# Altium PCB COMM_V3.PcbDoc (part 5 of 5)
Units mm, origin at the board's own origin, x right, y up, seen from the top; angles counter-clockwise.
Board outline 93 x 90 mm, 6 copper layers (Top Layer, L2_GND, L3_PWR, L4_SIG, L5_GND, Bottom Layer), stack 1.634 mm thick; 271 components, 237 nets, 1362 pads, 1090 vias.
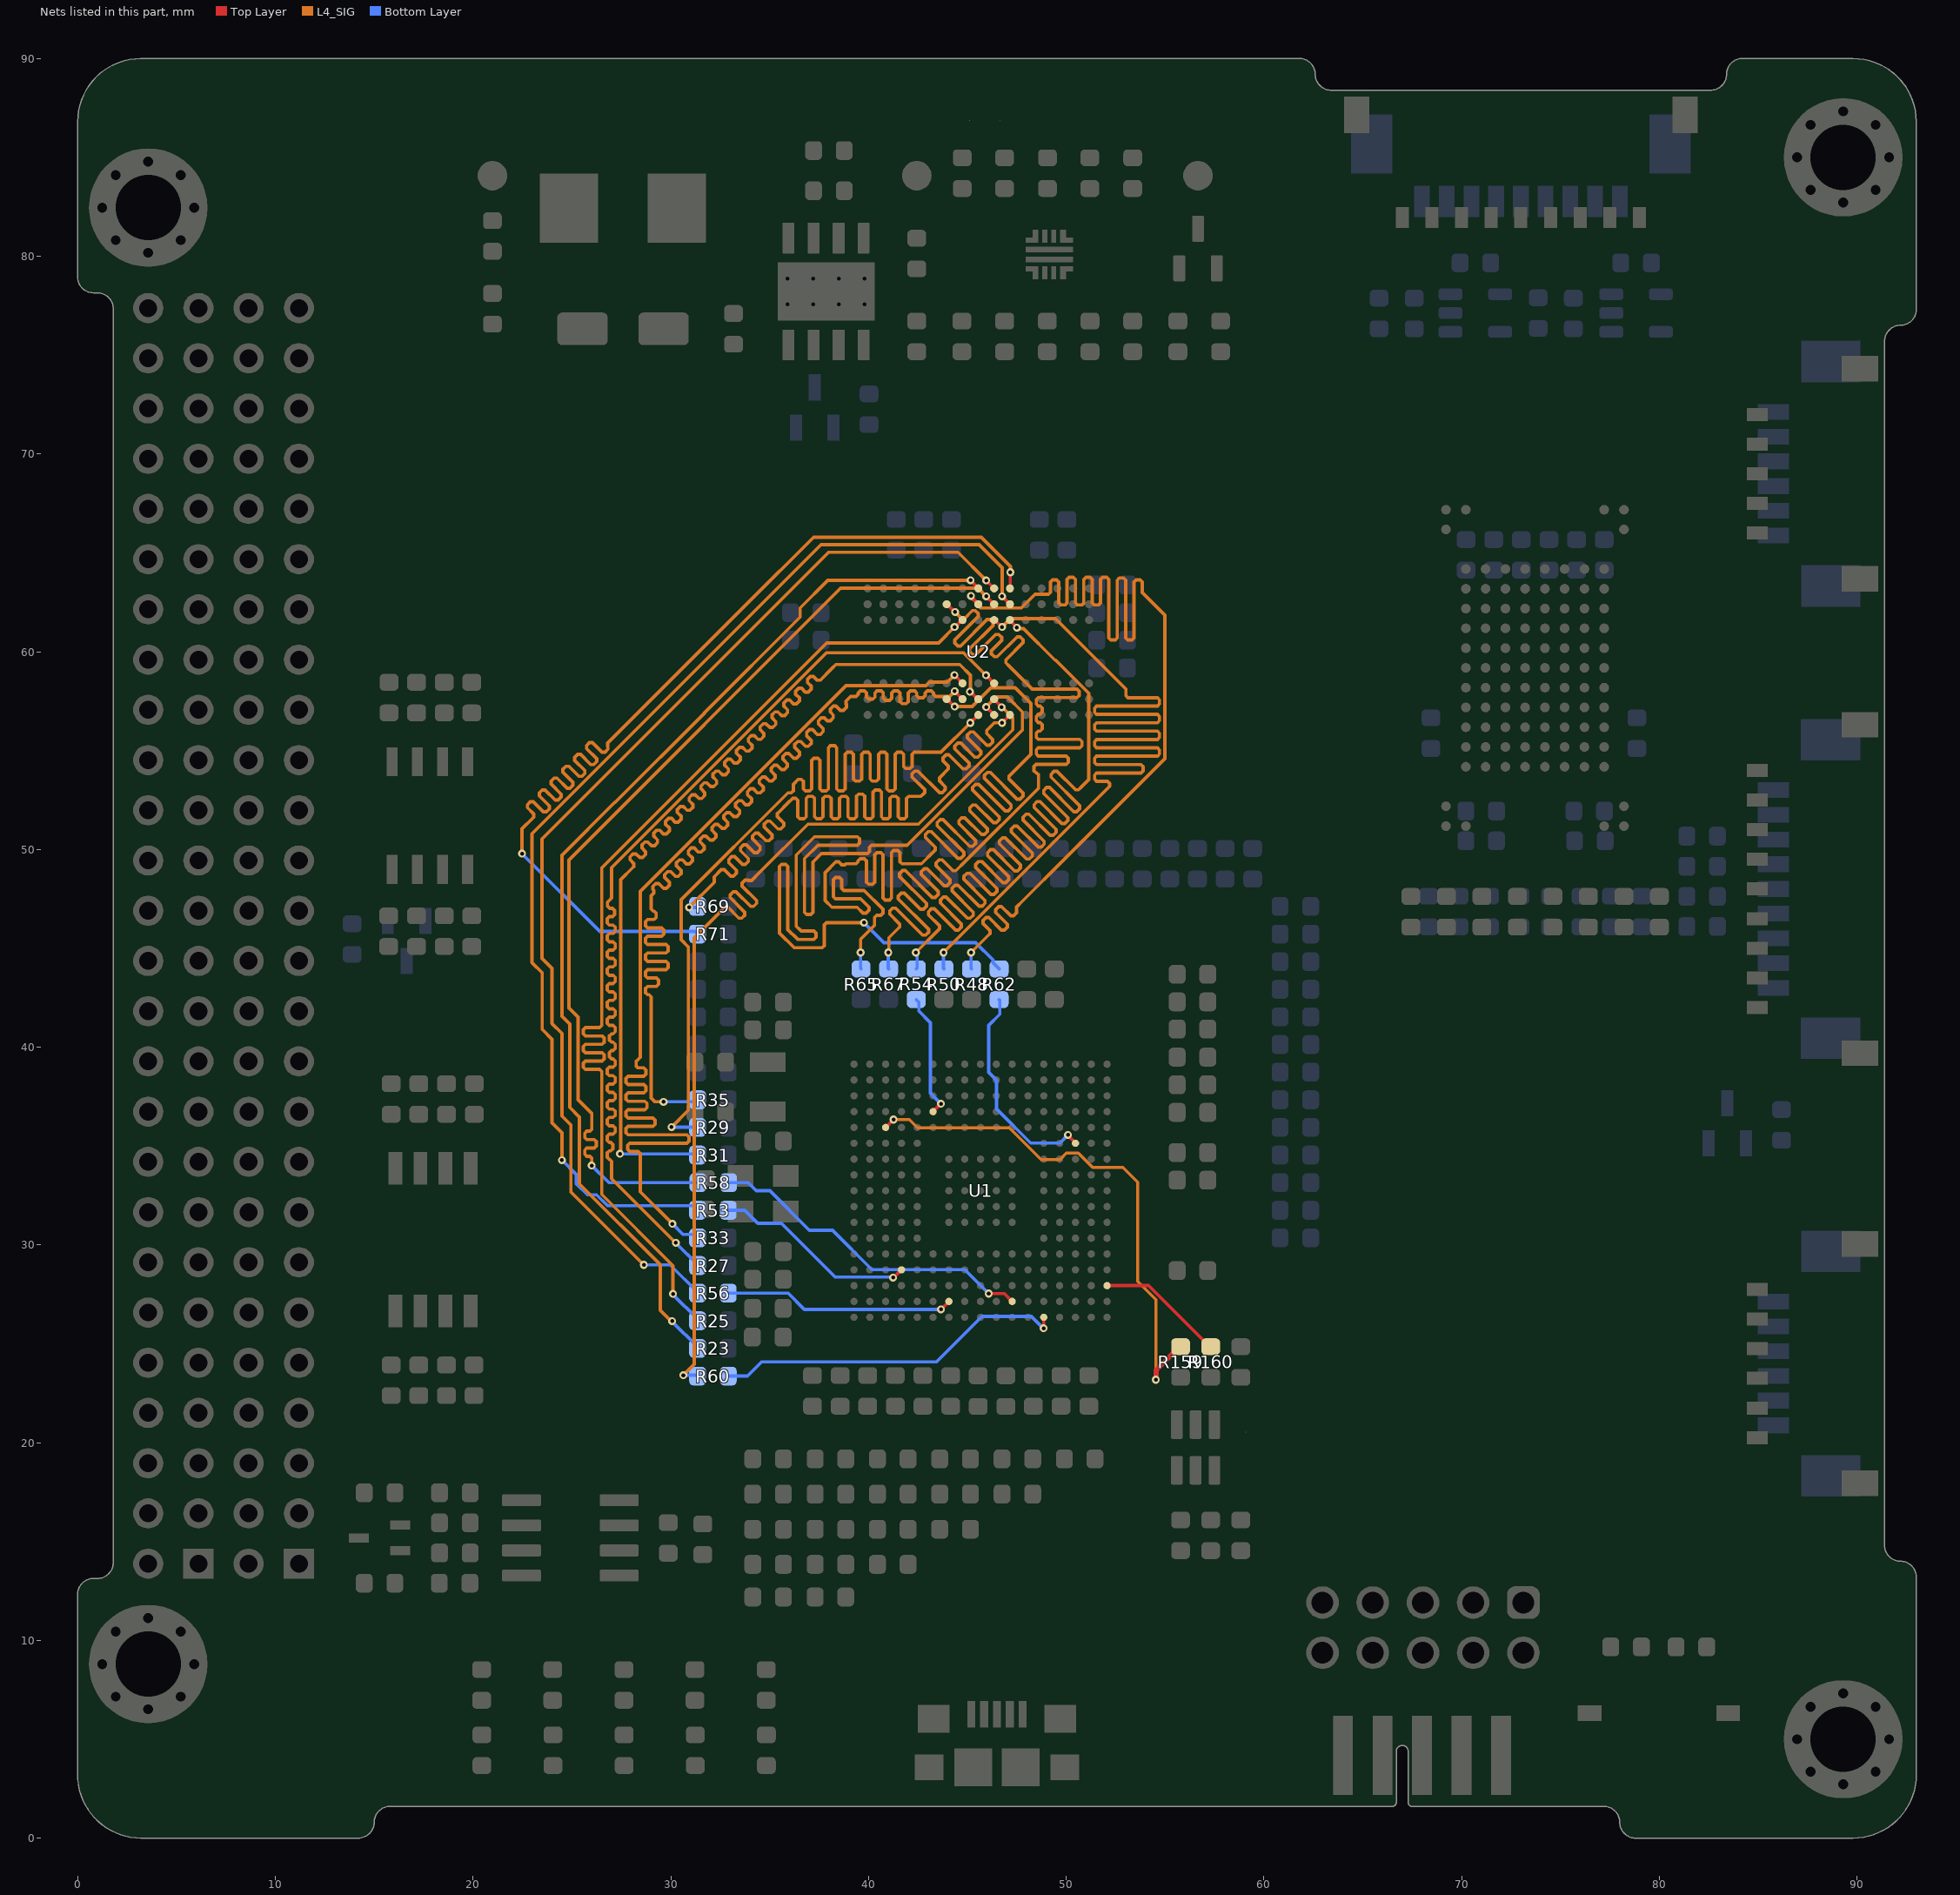
[diagram p9: the nets of this part, all layers, seen from the top]

## Via types
v1: diameter 0.4, hole 0.2, Top Layer to Bottom Layer, tented both sides, 1084 vias
v2: diameter 0.35, hole 0.2, Top Layer to Bottom Layer, tented both sides, 6 vias

## Nets (pads, with @x,y where several pads share a name; then routed paths per layer and width w, separated by ;. In a path a pad name is that pad's centre, name@x,y a point inside that pad or via, vN(x,y) a via of type N, cw(c..) or ccw(c..) an arc to the next point about the centre after c; other vN are vias at no path point) (continued)
SDRAM_R_A5: R35.2 U2.G2 | length 55.8
  Top Layer w0.169: v1(44.357,58.002) U2.G2@44.757,57.601
  L4_SIG w0.169: v1(29.637,37.238) 29.201,37.238 29.014,37.424 29.014,42.46 29.014,42.544 28.909,42.65 28.834,42.65 28.729,42.756 28.729,42.967 28.834,43.073 29.276,43.073 29.382,43.179 29.382,43.39 29.276,43.496 28.834,43.496 28.729,43.602 28.729,43.813 28.834,43.919 29.765,43.919 29.871,44.025 29.871,44.236 29.765,44.342 28.834,44.342 28.729,44.448 28.729,44.659 28.834,44.765 29.765,44.765 29.871,44.871 29.871,45.082 29.765,45.188 28.834,45.188 28.729,45.294 28.729,45.505 28.834,45.611 29.545,45.611 29.651,45.717 29.651,45.928 29.545,46.034 28.834,46.034 28.729,46.14 28.729,46.351 28.834,46.457 29.155,46.457 29.261,46.563 29.261,46.774 29.155,46.88 29.12,46.88 29.014,46.986 29.014,47.659 29.08,47.725 29.14,47.785 29.14,47.934 29.094,47.98 29.094,48.129 29.244,48.279 29.394,48.279 29.635,48.037 29.785,48.037 29.934,48.187 29.934,48.336 29.693,48.578 29.693,48.727 29.842,48.877 29.992,48.877 30.233,48.635 30.383,48.635 30.533,48.785 30.533,48.934 30.291,49.176 30.291,49.326 30.44,49.475 30.59,49.475 30.794,49.271 30.943,49.271 31.093,49.421 31.093,49.57 30.889,49.774 30.889,49.924 31.039,50.073 31.188,50.073 31.392,49.869 31.542,49.869 31.691,50.019 31.691,50.169 31.487,50.372 31.487,50.522 31.637,50.672 31.786,50.672 31.99,50.468 32.14,50.468 32.289,50.617 32.289,50.767 32.085,50.971 32.085,51.12 32.235,51.27 32.385,51.27 32.588,51.066 32.738,51.066 32.888,51.215 32.888,51.365 32.684,51.569 32.684,51.718 32.833,51.868 32.983,51.868 33.187,51.664 33.336,51.664 33.486,51.814 33.486,51.963 33.282,52.167 33.282,52.317 33.431,52.466 33.581,52.466 33.785,52.262 33.934,52.262 34.084,52.412 34.084,52.561 33.88,52.765 33.88,52.915 34.03,53.064 34.179,53.064 34.383,52.861 34.533,52.861 34.682,53.01 34.682,53.16 34.478,53.363 34.478,53.513 34.628,53.663 34.777,53.663 34.981,53.459 35.131,53.459 35.28,53.608 35.28,53.758 35.077,53.962 35.077,54.111 35.226,54.261 35.376,54.261 35.6,54.036 35.75,54.036 35.899,54.186 35.899,54.335 35.675,54.56 35.675,54.709 35.824,54.859 35.974,54.859 36.216,54.617 36.365,54.617 36.515,54.767 36.515,54.916 36.273,55.158 36.273,55.308 36.423,55.457 36.572,55.457 36.814,55.216 36.963,55.216 37.113,55.365 37.113,55.515 36.871,55.756 36.871,55.906 37.021,56.055 37.17,56.055 37.414,55.812 37.564,55.812 37.713,55.961 37.713,56.111 37.469,56.355 37.469,56.504 37.619,56.654 37.768,56.654 37.92,56.503 38.069,56.503 38.219,56.652 38.219,56.802 38.068,56.953 38.068,57.102 38.217,57.252 38.367,57.252 38.581,57.038 38.73,57.038 38.88,57.187 38.88,57.337 38.861,57.356 38.861,57.506 39.094,57.739 39.278,57.739 39.29,57.739 39.375,57.739 39.481,57.845 39.481,57.91 39.587,58.015 39.798,58.015 39.904,57.91 39.904,57.702 40.01,57.596 40.221,57.596 40.327,57.702 40.327,57.91 40.433,58.015 40.644,58.015 40.75,57.91 40.75,57.642 40.856,57.536 41.067,57.536 41.173,57.642 41.173,57.91 41.279,58.015 41.49,58.015 41.596,57.91 41.596,57.475 41.702,57.369 41.913,57.369 42.019,57.475 42.019,57.91 42.125,58.015 42.336,58.015 42.442,57.91 42.442,57.778 42.547,57.672 42.759,57.672 42.865,57.778 42.865,57.91 42.97,58.015 43.182,58.015 43.288,57.91 43.288,57.845 43.393,57.739 44.094,57.739 v1(44.357,58.002)
  Bottom Layer w0.169: v1(29.637,37.238) 31.256,37.238 R35.2@31.356,37.338
SDRAM_R_A6: R33.2 U2.G3 | length 54.3
  Top Layer w0.169: v1(44.352,58.821) 44.352,58.814 44.757,58.409 U2.G3@44.757,58.401
  L4_SIG w0.169: v1(30.08,31.063) 28.458,32.685 28.458,34.533 28.458,34.618 28.352,34.724 27.924,34.724 27.818,34.829 27.818,35.041 27.924,35.147 30.812,35.147 30.918,35.252 30.918,35.464 30.812,35.57 27.838,35.57 27.732,35.675 27.732,35.887 27.838,35.993 29.1,35.993 29.205,36.098 29.205,36.31 29.1,36.416 27.838,36.416 27.732,36.521 27.732,36.733 27.838,36.839 28.692,36.839 28.798,36.944 28.798,37.156 28.692,37.262 27.838,37.262 27.732,37.367 27.732,37.579 27.838,37.685 28.638,37.685 28.744,37.79 28.744,38.002 28.638,38.108 27.838,38.108 27.732,38.213 27.732,38.425 27.838,38.531 28.634,38.531 28.739,38.636 28.739,38.848 28.634,38.954 28.352,38.954 28.246,39.059 28.246,39.271 28.352,39.377 28.458,39.482 28.458,39.995 28.458,47.875 38.869,58.286 42.907,58.286 43.078,58.457 43.988,58.457 v1(44.352,58.821)
  Bottom Layer w0.169: v1(30.08,31.063) 30.612,30.531 31.178,30.531 R33.2@31.356,30.353
SDRAM_R_A7: R31.2 U2.H2 | length 53
  Top Layer w0.169: v1(45.131,57.977) 45.156,57.977 45.531,57.601 U2.H2@45.557,57.601
  L4_SIG w0.169: v1(27.432,34.603) 27.461,34.633 27.461,48.469 28.071,49.079 28.131,49.139 28.131,49.288 27.942,49.477 27.942,49.627 28.092,49.776 28.241,49.776 28.43,49.587 28.58,49.587 28.729,49.737 28.729,49.886 28.54,50.075 28.54,50.225 28.69,50.374 28.839,50.374 29.028,50.186 29.178,50.186 29.328,50.335 29.328,50.485 29.139,50.674 29.139,50.823 29.288,50.973 29.438,50.973 29.627,50.784 29.776,50.784 29.926,50.933 29.926,51.083 29.737,51.272 29.737,51.421 29.886,51.571 30.036,51.571 30.225,51.382 30.374,51.382 30.524,51.531 30.524,51.681 30.335,51.87 30.335,52.02 30.485,52.169 30.634,52.169 30.823,51.98 30.973,51.98 31.122,52.13 31.122,52.279 30.933,52.468 30.933,52.618 31.083,52.767 31.232,52.767 31.421,52.578 31.571,52.578 31.72,52.728 31.72,52.877 31.531,53.066 31.531,53.216 31.681,53.366 31.83,53.366 32.019,53.177 32.169,53.177 32.319,53.326 32.319,53.476 32.13,53.665 32.13,53.814 32.279,53.964 32.429,53.964 32.618,53.775 32.767,53.775 32.917,53.924 32.917,54.074 32.728,54.263 32.728,54.412 32.877,54.562 33.027,54.562 33.216,54.373 33.365,54.373 33.515,54.523 33.515,54.672 33.326,54.861 33.326,55.011 33.476,55.16 33.625,55.16 33.814,54.971 33.964,54.971 34.113,55.121 34.113,55.27 33.924,55.459 33.924,55.609 34.074,55.758 34.223,55.758 34.412,55.569 34.562,55.569 34.711,55.719 34.711,55.869 34.522,56.057 34.522,56.207 34.672,56.357 34.822,56.357 35.011,56.168 35.16,56.168 35.31,56.317 35.31,56.467 35.121,56.656 35.121,56.805 35.27,56.955 35.42,56.955 35.609,56.766 35.758,56.766 35.908,56.915 35.908,57.065 35.719,57.254 35.719,57.403 35.868,57.553 36.018,57.553 36.207,57.364 36.357,57.364 36.506,57.514 36.506,57.663 36.317,57.852 36.317,58.002 36.467,58.151 36.616,58.151 36.805,57.962 36.955,57.962 37.104,58.112 37.104,58.261 36.915,58.45 36.915,58.6 37.065,58.749 37.214,58.749 37.407,58.557 37.557,58.557 38.144,59.144 38.204,59.204 38.351,59.35 44.62,59.35 45.156,58.814 45.156,58.003 v1(45.131,57.977)
  Bottom Layer w0.169: v1(27.432,34.603) 31.297,34.603 R31.2@31.356,34.544
SDRAM_R_A8: R29.2 U2.H1 | length 52
  Top Layer w0.169: v1(45.156,56.402) U2.H1@45.556,56.801
  L4_SIG w0.169: v1(30.035,35.958) 30.889,36.813 30.889,45.062 30.52,45.431 30.52,47.456 35.928,52.864 36.097,52.864 36.196,52.963 36.196,53.293 36.448,53.545 36.598,53.545 36.703,53.439 36.703,53.061 36.809,52.955 37.021,52.955 37.126,53.061 37.126,54.508 37.232,54.613 37.444,54.613 37.549,54.508 37.549,53.061 37.655,52.955 37.867,52.955 37.972,53.061 37.972,55.144 38.078,55.25 38.29,55.25 38.395,55.144 38.395,53.061 38.501,52.955 38.713,52.955 38.818,53.061 38.818,54.806 38.924,54.912 39.136,54.912 39.241,54.806 39.241,53.559 39.347,53.454 39.559,53.454 39.664,53.559 39.664,54.806 39.77,54.912 39.982,54.912 40.087,54.806 40.087,53.564 40.193,53.458 40.405,53.458 40.51,53.564 40.51,54.806 40.616,54.912 40.828,54.912 40.933,54.806 40.933,53.061 41.039,52.955 41.251,52.955 41.356,53.061 41.356,54.806 41.462,54.912 41.674,54.912 41.779,54.806 41.779,54.199 41.885,54.093 42.097,54.093 42.202,54.199 42.202,54.806 42.308,54.912 43.31,54.912 43.665,54.912 v1(45.156,56.402)
  Bottom Layer w0.169: v1(30.035,35.958) 31.339,35.958 R29.2@31.356,35.941
SDRAM_R_A9: R27.2 U2.J3 | length 54.4
  Top Layer w0.169: v1(45.941,58.806) 45.947,58.806 46.351,58.401 U2.J3@46.357,58.401
  L4_SIG w0.169: 26.907,47.444 26.801,47.338 26.801,47.126 26.907,47.021 27.056,47.021 27.162,46.915 27.162,46.703 27.056,46.598 26.885,46.598 26.779,46.492 26.779,46.28 26.885,46.175 27.085,46.175 27.191,46.069 27.191,45.857 27.085,45.752 26.885,45.752 26.779,45.646 26.779,45.434 26.885,45.329 27.085,45.329 27.191,45.223 27.191,45.011 27.085,44.906 26.885,44.906 26.779,44.8 26.779,44.588 26.885,44.483 27.085,44.483 27.191,44.377 27.191,44.165 27.085,44.06 26.885,44.06 26.779,43.954 26.779,43.742 26.885,43.637 27.085,43.637 27.191,43.531 27.191,43.319 27.085,43.214 26.885,43.214 26.779,43.108 26.779,42.896 26.885,42.791 27.085,42.791 27.191,42.685 27.191,42.473 27.085,42.368 26.885,42.368 26.779,42.262 26.779,42.05 26.885,41.945 27.085,41.945 27.191,41.839 27.191,41.627 27.085,41.522 26.885,41.522 26.779,41.416 26.779,41.204 26.885,41.099 27.085,41.099 27.191,40.993 27.191,40.781 27.085,40.676 27.004,40.676 26.898,40.57 26.898,40.358 27.004,40.253 27.085,40.253 27.191,40.147 27.191,39.935 27.085,39.83 27.004,39.83 26.898,39.724 26.898,39.512 27.004,39.407 27.085,39.407 27.191,39.301 27.191,39.089 27.085,38.984 26.885,38.984 26.779,38.878 26.779,38.666 26.885,38.561 27.085,38.561 27.191,38.455 27.191,38.243 27.085,38.138 26.885,38.138 26.779,38.032 26.779,37.82 26.885,37.715 27.085,37.715 27.191,37.609 27.191,37.397 27.085,37.292 26.885,37.292 26.779,37.186 26.779,36.974 26.885,36.869 27.085,36.869 27.191,36.763 27.191,36.551 27.085,36.446 26.885,36.446 26.779,36.34 26.779,36.128 26.885,36.023 27.085,36.023 27.191,35.917 27.191,35.705 27.085,35.6 26.885,35.6 26.779,35.494 26.779,35.282 26.885,35.177 26.966,35.177 27.072,35.071 27.072,34.859 26.966,34.754 26.885,34.754 26.779,34.648 26.779,34.436 26.885,34.331 26.907,34.331 27.013,34.225 27.013,34.14 27.013,33.349 v1(30.255,30.107) ; 26.907,47.444 27.013,47.549 27.013,48.725 27.013,49.08 37.878,59.945 44.65,59.945 44.803,59.945 v1(45.941,58.806)
  Bottom Layer w0.169: v1(30.255,30.107) 31.356,29.006 R27.2@31.356,28.956
SDRAM_R_A10: R25.2 U2.G7 | length 53.6
  Top Layer w0.169: v1(44.356,61.25) 44.38,61.25 44.732,61.601 U2.G7@44.757,61.601
  L4_SIG w0.169: v1(30.115,27.52) 30.115,28.948 26.509,32.554 26.509,38.684 26.509,38.769 26.403,38.874 25.688,38.874 25.582,38.98 25.582,39.192 25.688,39.297 26.522,39.297 26.627,39.403 26.627,39.615 26.522,39.72 25.688,39.72 25.582,39.826 25.582,40.038 25.688,40.143 26.522,40.143 26.627,40.249 26.627,40.461 26.522,40.566 25.688,40.566 25.582,40.672 25.582,40.884 25.688,40.989 26.403,40.989 26.509,41.095 26.509,42.135 26.509,49.072 37.884,60.447 43.553,60.447 v1(44.356,61.25)
  Bottom Layer w0.169: v1(30.115,27.52) 30.115,27.487 31.356,26.245 R25.2@31.356,26.162
SDRAM_R_A11: R23.2 U2.H9 | length 55.1
  Top Layer w0.169: v1(45.166,63.613) 45.166,63.602 45.552,63.216 U2.H9@45.552,63.197
  L4_SIG w0.169: v1(30.068,26.144) 30.019,26.144 29.464,26.699 29.464,29.003 25.382,33.085 25.382,36.465 24.893,36.955 24.893,41.163 24.494,41.562 24.494,49.702 27.173,52.381 27.197,52.381 31.692,56.877 31.692,56.901 36.542,61.751 36.542,62.209 37.936,63.603 45.156,63.603 v1(45.166,63.613)
  Bottom Layer w0.169: v1(30.068,26.144) 30.068,26.124 31.356,24.835 R23.2@31.356,24.765
SDRAM_R_BA0: R50.2 U2.J7 | length 55.1
  Top Layer w0.169: U2.J7@46.357,61.601 46.381,61.601 46.732,61.25 v1(46.756,61.25)
  L4_SIG w0.169: v1(43.795,44.788) 52.112,53.105 52.197,53.19 52.197,53.339 52.091,53.445 51.543,53.445 51.437,53.551 51.437,53.762 51.543,53.868 53.783,53.868 53.889,53.974 53.889,54.185 53.783,54.291 51.543,54.291 51.437,54.397 51.437,54.608 51.543,54.714 54.615,54.714 54.72,54.82 54.72,55.031 54.615,55.137 51.543,55.137 51.437,55.243 51.437,55.454 51.543,55.56 54.615,55.56 54.72,55.666 54.72,55.877 54.615,55.983 51.543,55.983 51.437,56.089 51.437,56.3 51.543,56.406 54.615,56.406 54.72,56.512 54.72,56.723 54.615,56.829 51.543,56.829 51.437,56.935 51.437,57.146 51.543,57.252 54.615,57.252 54.72,57.358 54.72,57.569 54.615,57.675 53.13,57.675 53.024,57.781 53.024,58.109 52.928,58.206 49.456,61.677 47.184,61.677 v1(46.756,61.25)
  Bottom Layer w0.169: v1(43.795,44.788) 43.795,43.975 R50.2@43.815,43.955
SDRAM_R_BA1: R48.2 U2.H8 | length 57.5
  Top Layer w0.169: v1(45.183,62.821) 45.183,62.798 45.557,62.425 U2.H8@45.557,62.401
  L4_SIG w0.169: v1(45.183,62.821) 45.183,62.759 45.466,62.476 45.466,62.403 45.653,62.216 47.742,62.216 48.426,62.9 49.01,62.9 49.095,62.9 49.2,63.006 49.2,63.529 49.306,63.634 49.518,63.634 49.623,63.529 49.623,62.469 49.729,62.363 49.941,62.363 50.046,62.469 50.046,63.652 50.152,63.758 50.364,63.758 50.469,63.652 50.469,62.469 50.575,62.363 50.787,62.363 50.892,62.469 50.892,63.652 50.998,63.758 51.21,63.758 51.315,63.652 51.315,62.469 51.421,62.363 51.633,62.363 51.738,62.469 51.738,63.652 51.844,63.758 52.056,63.758 52.161,63.652 52.161,60.696 52.267,60.59 52.479,60.59 52.584,60.696 52.584,63.621 52.69,63.727 52.902,63.727 53.007,63.621 53.007,60.696 53.113,60.59 53.325,60.59 53.43,60.696 53.43,63.529 53.536,63.634 53.748,63.634 53.853,63.529 53.853,62.987 54.325,62.515 54.991,61.849 54.991,54.588 49.882,49.478 47.808,47.405 47.497,47.093 47.497,46.944 47.497,46.794 47.347,46.645 47.198,46.645 46.733,47.11 46.583,47.11 46.433,46.96 46.433,46.811 47.024,46.22 47.024,46.07 46.874,45.921 46.725,45.921 46.093,46.553 45.943,46.553 45.793,46.404 45.793,46.254 46.151,45.897 46.151,45.747 46.091,45.688 v1(45.191,44.788)
  Bottom Layer w0.169: v1(45.191,44.788) 45.191,43.976 R48.2@45.212,43.955
SDRAM_R_NBL0: R71.2 U2.K9 | length 53.9
  Top Layer w0.169: U2.K9@47.157,63.201 47.168,63.213 47.168,64.003 v1(47.18,64.014)
  L4_SIG w0.169: v1(22.479,49.784) 22.479,51.045 23.013,51.579 23.073,51.639 23.073,51.789 22.75,52.112 22.75,52.261 22.9,52.411 23.049,52.411 23.559,51.9 23.709,51.9 23.859,52.05 23.859,52.199 23.348,52.71 23.348,52.859 23.498,53.009 23.647,53.009 24.158,52.498 24.307,52.498 24.457,52.648 24.457,52.798 23.946,53.308 23.946,53.458 24.096,53.607 24.245,53.607 24.756,53.097 24.905,53.097 25.055,53.246 25.055,53.396 24.545,53.906 24.545,54.056 24.694,54.205 24.844,54.205 25.354,53.695 25.504,53.695 25.653,53.844 25.653,53.994 25.143,54.504 25.143,54.654 25.292,54.804 25.442,54.804 25.952,54.293 26.102,54.293 26.251,54.443 26.251,54.592 25.741,55.103 25.741,55.252 25.891,55.402 26.04,55.402 26.52,54.922 26.669,54.922 26.819,55.072 26.819,55.221 26.812,55.228 26.812,55.378 33.851,62.418 37.226,65.792 45.704,65.792 47.179,64.318 v1(47.18,64.014)
  Bottom Layer w0.169: v1(22.479,49.784) 26.413,45.85 31.226,45.85 R71.2@31.356,45.72
SDRAM_R_NBL1: R69.2 U2.K1 | length 51.5
  Top Layer w0.169: v1(46.756,56.402) U2.K1@47.157,56.801
  L4_SIG w0.169: v1(30.929,47.069) 32.192,48.331 32.192,48.613 32.551,48.972 32.7,48.972 33.027,48.645 33.177,48.645 33.326,48.794 33.326,48.944 32.933,49.337 32.933,49.487 33.083,49.636 33.232,49.636 33.625,49.243 33.775,49.243 33.925,49.393 33.925,49.542 33.531,49.935 33.531,50.085 33.681,50.235 33.83,50.235 34.224,49.841 34.373,49.841 34.523,49.991 34.523,50.14 34.13,50.534 34.13,50.683 34.279,50.833 34.429,50.833 34.822,50.439 34.971,50.439 35.121,50.589 35.121,50.739 34.728,51.132 34.728,51.281 34.877,51.431 35.027,51.431 35.42,51.038 35.57,51.038 35.719,51.187 35.719,51.337 35.392,51.664 35.392,51.813 35.468,51.889 35.92,52.341 36.172,52.594 36.322,52.594 36.428,52.488 36.428,51.653 36.534,51.548 36.745,51.548 36.851,51.653 36.851,52.579 36.957,52.684 37.168,52.684 37.274,52.579 37.274,51.653 37.38,51.548 37.591,51.548 37.697,51.653 37.697,52.579 37.802,52.684 38.014,52.684 38.12,52.579 38.12,51.653 38.225,51.548 38.437,51.548 38.543,51.653 38.543,52.579 38.648,52.684 38.86,52.684 38.966,52.579 38.966,51.653 39.071,51.548 39.283,51.548 39.389,51.653 39.389,52.69 39.494,52.795 39.706,52.795 39.812,52.69 39.812,51.653 39.917,51.548 40.129,51.548 40.235,51.653 40.235,52.897 40.34,53.003 40.552,53.003 40.658,52.897 40.658,51.653 40.763,51.548 40.975,51.548 41.081,51.653 41.081,52.579 41.186,52.684 41.398,52.684 41.504,52.579 41.504,51.653 41.609,51.548 41.821,51.548 41.927,51.653 41.927,52.579 42.032,52.684 42.202,52.684 42.651,52.684 42.781,52.814 42.841,52.874 42.841,53.023 42.2,53.664 42.2,53.814 42.35,53.963 42.499,53.963 43.59,52.873 43.74,52.873 43.889,53.022 43.889,53.172 43.589,53.472 43.589,53.622 44.037,54.07 44.037,54.22 43.772,54.486 43.772,54.635 43.921,54.785 44.071,54.785 44.786,54.069 44.936,54.069 45.085,54.219 45.085,54.368 44.37,55.084 44.37,55.233 44.519,55.383 44.669,55.383 45.385,54.667 45.534,54.667 45.684,54.817 45.684,54.966 45.008,55.642 45.008,55.792 45.158,55.941 45.307,55.941 45.983,55.265 46.132,55.265 46.282,55.415 46.282,55.565 45.982,55.865 45.982,56.015 46.237,56.27 46.369,56.402 v1(46.756,56.402)
  Bottom Layer w0.169: v1(30.929,47.069) 31.308,47.069 R69.2@31.356,47.117
SDRAM_R_NBL2: R67.2 U2.F8 | length 62.3
  Top Layer w0.169: U2.F8@43.957,62.401 43.973,62.401 44.364,62.01 v1(44.38,62.01)
  L4_SIG w0.169: v1(41.001,44.788) 41.033,44.82 41.033,45.534 41.519,46.02 41.579,46.08 41.579,46.229 41.077,46.732 41.077,46.881 41.226,47.031 41.376,47.031 42.742,45.664 42.892,45.664 43.041,45.814 43.041,45.964 41.511,47.494 41.511,47.644 41.66,47.793 41.81,47.793 42.63,46.974 42.779,46.974 42.929,47.123 42.929,47.273 41.57,48.632 41.57,48.781 41.719,48.931 41.869,48.931 43.228,47.572 43.377,47.572 43.527,47.721 43.527,47.871 42.668,48.73 42.668,48.879 42.818,49.029 42.967,49.029 43.826,48.17 43.976,48.17 44.125,48.32 44.125,48.469 43.423,49.172 43.423,49.321 43.572,49.471 43.722,49.471 44.271,48.921 44.421,48.921 44.897,49.398 48.604,53.105 48.604,53.683 48.604,53.768 48.499,53.874 48.472,53.874 48.367,53.979 48.367,54.191 48.472,54.297 49.996,54.297 50.102,54.402 50.102,54.614 49.996,54.72 48.595,54.72 48.489,54.825 48.489,55.037 48.595,55.143 50.694,55.143 50.8,55.248 50.8,55.46 50.694,55.566 48.595,55.566 48.489,55.671 48.489,55.883 48.595,55.989 48.689,55.989 48.795,56.094 48.795,56.306 48.689,56.412 48.595,56.412 48.489,56.517 48.489,56.729 48.595,56.835 48.689,56.835 48.795,56.94 48.795,57.152 48.689,57.258 48.595,57.258 48.489,57.363 48.489,57.575 48.595,57.681 50.55,57.681 50.656,57.786 50.656,57.998 50.55,58.104 48.287,58.104 47.931,58.46 47.101,59.29 46.953,59.438 46.953,59.587 47.822,60.456 47.822,60.606 47.672,60.755 47.523,60.755 46.514,59.746 46.364,59.746 46.215,59.896 46.215,60.045 46.74,60.571 46.74,60.72 46.59,60.87 46.441,60.87 45.425,59.854 45.276,59.854 45.126,60.004 45.126,60.153 46.296,61.323 46.296,61.472 46.146,61.622 45.996,61.622 44.665,60.29 44.515,60.29 44.366,60.44 44.366,60.589 45.556,61.78 45.556,61.93 45.407,62.079 45.257,62.079 44.859,61.681 44.71,61.681 44.65,61.741 v1(44.38,62.01)
  Bottom Layer w0.169: v1(41.001,44.788) 41.001,43.975 R67.2@41.021,43.955
SDRAM_R_NBL3: R65.2 U2.F2 | length 63.9
  Top Layer w0.169: U2.F2@43.957,57.601 43.969,57.601 44.345,57.225 v1(44.357,57.225)
  L4_SIG w0.169: v1(39.604,44.788) 39.604,45.45 40.308,46.155 40.308,46.474 40.308,46.559 40.414,46.665 40.626,46.665 40.731,46.77 40.731,46.969 39.78,47.921 38.754,47.921 38.648,48.027 38.648,48.47 38.543,48.575 38.331,48.575 38.225,48.47 38.225,47.604 38.331,47.498 39.604,47.498 40.026,47.076 40.026,46.927 39.876,46.777 39.727,46.777 39.429,47.075 38.149,47.075 37.802,47.422 37.802,48.82 38.351,49.368 38.5,49.368 38.65,49.219 38.799,49.219 38.857,49.276 39.283,49.276 39.368,49.276 39.473,49.382 39.473,49.418 39.579,49.524 39.791,49.524 39.896,49.418 39.896,48.344 40.002,48.238 40.214,48.238 40.319,48.344 40.319,49.727 40.425,49.832 40.637,49.832 40.742,49.727 40.742,47.542 40.848,47.436 41.06,47.436 41.165,47.542 41.165,49.841 41.271,49.947 41.483,49.947 41.588,49.841 41.588,49.382 41.694,49.276 42.16,49.276 42.682,49.276 43.31,49.903 43.37,49.963 43.37,50.113 42.878,50.604 42.878,50.754 43.028,50.903 43.177,50.903 44.524,49.557 44.673,49.557 44.823,49.706 44.823,49.856 43.476,51.203 43.476,51.352 43.626,51.502 43.775,51.502 45.122,50.155 45.272,50.155 45.421,50.305 45.421,50.454 44.572,51.303 44.572,51.453 44.722,51.602 44.871,51.602 45.72,50.753 45.87,50.753 46.019,50.903 46.019,51.052 45.126,51.946 45.126,52.096 45.275,52.245 45.425,52.245 46.318,51.351 46.468,51.351 46.618,51.501 46.618,51.651 45.271,52.997 45.271,53.147 45.421,53.296 45.57,53.296 46.917,51.95 47.066,51.95 47.216,52.099 47.216,52.249 45.869,53.595 45.869,53.745 46.019,53.894 46.168,53.894 47.515,52.548 47.664,52.548 47.814,52.697 47.814,52.847 47.108,53.553 47.108,53.702 47.272,53.865 48.219,54.812 48.219,57.384 47.43,58.173 46.197,58.173 45.249,57.225 v1(44.357,57.225)
  Bottom Layer w0.169: v1(39.604,44.788) 39.604,43.975 R65.2@39.624,43.955
SDRAM_R_SDCKE1: R60.2 U2.J2 | length 49.9
  Top Layer w0.169: U2.J2@46.357,57.601 46.357,57.584 46.735,57.206 v1(46.735,57.189)
  L4_SIG w0.169: v1(30.637,23.408) 31.188,23.959 31.188,45.526 32.381,46.719 32.74,47.078 32.89,47.078 33.445,46.523 33.595,46.523 33.744,46.672 33.744,46.822 33.006,47.56 33.006,47.71 33.155,47.86 33.305,47.86 34.043,47.121 34.193,47.121 34.342,47.271 34.342,47.42 33.614,48.148 33.614,48.298 33.764,48.447 33.913,48.447 33.936,48.424 34.086,48.424 34.523,48.861 36.939,51.277 42.527,51.277 47.303,56.054 47.303,56.658 46.773,57.189 v1(46.735,57.189)
  Bottom Layer w0.169: v1(30.637,23.408) 31.314,23.408 R60.2@31.358,23.364
SDRAM_R_SDCLK: R62.2 U2.J1 | length 57.4
  Top Layer w0.169: v1(45.956,57.205) 45.956,57.203 U2.J1@46.357,56.801 U2.J1@46.357,56.801
  L4_SIG w0.169: v1(39.772,46.296) 37.959,46.296 37.875,46.296 37.769,46.191 37.769,45.768 37.769,45.133 37.663,45.027 36.241,45.027 35.498,45.771 35.498,49.144 35.604,49.25 35.815,49.25 35.921,49.144 35.921,45.946 36.417,45.45 37.24,45.45 37.346,45.556 37.346,45.768 37.24,45.873 36.592,45.873 36.344,46.121 36.344,49.715 37.269,50.641 39.448,50.641 39.554,50.535 39.554,50.323 39.448,50.218 37.445,50.218 36.767,49.54 36.767,46.825 36.873,46.719 37.084,46.719 37.19,46.825 37.19,49.365 37.62,49.795 39.952,49.795 40.057,49.9 40.057,50.112 40.163,50.218 40.248,50.218 41.959,50.218 47.786,56.045 47.786,56.952 47.022,57.717 46.468,57.717 v1(45.956,57.205)
  Bottom Layer w0.169: v1(39.772,46.296) 39.772,46.295 40.786,45.281 45.428,45.281 46.298,44.411 46.298,44.266 R62.2@46.609,43.955
SDRAM_R_SDNCAS: R54.2 U2.K7 | length 61.7
  Top Layer w0.169: U2.K7@47.157,61.601 47.157,61.582 47.503,61.236 v1(47.503,61.216)
  L4_SIG w0.169: v1(42.398,44.788) 43.536,45.926 43.596,45.986 43.596,46.135 43.034,46.697 43.034,46.846 43.184,46.996 43.333,46.996 44.402,45.927 44.552,45.927 44.701,46.077 44.701,46.226 43.633,47.295 43.633,47.444 43.782,47.594 43.932,47.594 45,46.525 45.15,46.525 45.299,46.675 45.299,46.824 44.231,47.893 44.231,48.042 44.38,48.192 44.53,48.192 45.598,47.124 45.748,47.124 45.898,47.273 45.898,47.423 44.829,48.491 44.829,48.641 44.979,48.79 45.128,48.79 46.197,47.722 46.346,47.722 46.496,47.871 46.496,48.021 45.427,49.089 45.427,49.239 45.577,49.388 45.726,49.388 46.795,48.32 46.944,48.32 47.094,48.469 47.094,48.619 46.025,49.688 46.025,49.837 46.175,49.987 46.325,49.987 47.393,48.918 47.543,48.918 47.692,49.068 47.692,49.217 46.624,50.286 46.624,50.435 46.773,50.585 46.923,50.585 47.991,49.516 48.141,49.516 48.29,49.666 48.29,49.815 47.222,50.884 47.222,51.034 47.371,51.183 47.521,51.183 48.589,50.115 48.739,50.115 48.889,50.264 48.889,50.414 47.82,51.482 47.82,51.632 47.97,51.781 48.119,51.781 49.188,50.713 49.337,50.713 49.487,50.862 49.487,51.012 48.379,52.12 48.379,52.269 48.528,52.419 48.678,52.419 49.786,51.311 49.935,51.311 50.085,51.461 50.085,51.61 48.863,52.832 48.863,52.981 49.013,53.131 49.162,53.131 50.384,51.909 50.534,51.909 50.683,52.059 50.683,52.208 49.239,53.652 49.239,53.802 49.389,53.951 49.539,53.951 50.475,53.015 50.625,53.015 50.708,53.098 51.137,53.527 51.137,57.9 49.467,59.569 49.438,59.569 47.835,61.172 47.547,61.172 v1(47.503,61.216)
  Bottom Layer w0.169: v1(42.398,44.788) 42.398,44.739 42.465,44.672 42.465,44.002 R54.2@42.418,43.955
SDRAM_R_SDNE1: R58.2 U2.J8 | length 50.6
  Top Layer w0.169: v1(45.957,62.802) U2.J8@46.347,62.411
  L4_SIG w0.169: v1(26.001,34.015) 26.009,34.023 26.009,34.29 26.009,34.375 25.903,34.48 25.759,34.48 25.653,34.586 25.653,34.798 25.759,34.903 26.133,34.903 26.238,35.009 26.238,35.221 26.133,35.326 25.759,35.326 25.653,35.432 25.653,35.644 25.759,35.749 25.903,35.749 26.009,35.855 26.009,36.5 26.009,36.634 25.312,37.332 25.312,41.525 24.849,41.987 24.849,49.467 38.59,63.207 45.552,63.207 v1(45.957,62.802)
  Bottom Layer w0.169: v1(26.001,34.015) 26.868,33.147 R58.2@31.376,33.147
SDRAM_R_SDNRAS: R56.2 U2.J9 | length 56.6
  Top Layer w0.169: v1(45.957,63.602) U2.J9@46.357,63.201
  L4_SIG w0.169: v1(28.64,28.991) 24.952,32.679 24.952,36.057 24.494,36.515 24.494,40.694 23.99,41.197 23.99,43.979 23.486,44.483 23.486,50.529 37.988,65.03 44.528,65.03 v1(45.957,63.602)
  Bottom Layer w0.169: v1(28.64,28.991) 29.967,28.991 31.356,27.602 R56.2@31.356,27.559
SDRAM_R_SDNWE: R53.2 U2.K8 | length 57.6
  Top Layer w0.169: v1(46.757,62.802) U2.K8@47.157,62.401
  L4_SIG w0.169: v1(24.494,34.29) 24.494,35.669 23.99,36.173 23.99,40.401 23.495,40.897 23.495,43.77 22.987,44.278 22.987,50.796 37.603,65.411 45.592,65.411 46.757,64.247 v1(46.757,62.802)
  Bottom Layer w0.169: v1(24.494,34.29) 25.223,33.561 25.223,33.098 25.787,32.534 26.25,32.534 26.804,31.98 31.126,31.98 R53.2@31.356,31.75
SDRAM_SDCKE1: R60.1 U1.U13 | length 18
  Top Layer w0.169: v1(48.86,25.785) 48.865,25.79 48.865,26.335 U1.U13@48.869,26.339
  Bottom Layer w0.169: R60.1@32.908,23.364 33.88,23.364 34.601,24.085 43.449,24.085 45.742,26.378 48.232,26.378 48.825,25.785 v1(48.86,25.785)
SDRAM_SDCLK: R62.1 U1.F15 | length 11
  Top Layer w0.169: v1(50.093,35.559) 50.093,35.537 50.469,35.161 U1.F15@50.469,35.139
  Bottom Layer w0.169: R62.1@46.609,42.405 46.641,42.373 46.641,41.662 46.082,41.104 46.082,38.72 46.47,38.331 46.47,36.884 48.204,35.151 49.684,35.151 v1(50.093,35.559)
SDRAM_SDNCAS: R54.1 U1.D6 | length 6.3
  Top Layer w0.169: U1.D6@43.269,36.739 v1(43.669,37.139)
  Bottom Layer w0.169: R54.1@42.418,42.405 42.55,42.273 42.55,41.825 43.135,41.24 43.135,37.673 v1(43.669,37.139)
SDRAM_SDNE1: R58.1 U1.T11 | length 16.8
  Top Layer w0.169: v1(46.081,27.539) 46.869,27.539 U1.T11@47.269,27.139
  Bottom Layer w0.169: R58.1@32.926,33.147 33.913,33.147 34.322,32.738 35.009,32.738 37.008,30.739 38.184,30.739 40.173,28.75 44.871,28.75 v1(46.081,27.539)
SDRAM_SDNRAS: R56.1 U1.T7 | length 11.7
  Top Layer w0.169: v1(43.669,26.739) U1.T7@44.069,27.139
  Bottom Layer w0.169: R56.1@32.906,27.559 35.941,27.559 36.761,26.739 v1(43.669,26.739)
SDRAM_SDNWE: R53.1 U1.P4 | length 10.3
  Top Layer w0.169: v1(41.244,28.348) 41.261,28.348 41.652,28.739 U1.P4@41.669,28.739
  Bottom Layer w0.169: R53.1@32.906,31.75 33.746,31.75 34.407,31.089 35.601,31.089 38.316,28.374 41.219,28.374 v1(41.244,28.348)
WAKEUP: R159.2 U1.E3 | length 27.1
  Top Layer w0.169: U1.E3@40.869,35.939 v1(41.269,36.339)
  Top Layer w0.254: v1(54.536,23.183) 54.554,23.201 54.554,23.669 55.737,24.852 R159.2@55.787,24.852
  L4_SIG w0.152: v1(41.269,36.339) 42.069,36.339 42.493,35.915 47.127,35.915 48.727,34.315 49.689,34.315 50.014,34.639 50.614,34.639 51.34,33.913 52.876,33.913 53.62,33.169 53.62,28.152 54.536,27.236 v1(54.536,23.183)
WD_DONE: R160.2 U1.R17 | length 6.5
  Top Layer w0.169: U1.R17@52.069,27.939 54.169,27.939 57.256,24.852 R160.2@57.311,24.852
pads on no net: H1.02 H1.04 H1.05 H1.06 H1.07 H1.08 H1.09 H1.10 H1.11 H1.12 H1.13 H1.14 H1.15 H1.16 H1.17 H1.18 H1.19 H1.20 H1.21 H1.22 H1.23 H1.24 H1.25 H1.26 H1.27 H1.28 H1.29 H1.30 H1.31 H1.32 H1.33 H1.34 H1.35 H1.36 H1.37 H1.38 H1.39 H1.40 H1.42 H1.44 H1.45 H1.46 H1.47 H1.48 H1.49 H1.50 H1.51 H1.52 H2.01 H2.02 H2.03 H2.04 H2.05 H2.06 H2.07 H2.08 H2.09 H2.10 H2.11 H2.12 H2.13 H2.14 H2.15 H2.16 H2.17 H2.18 H2.19 H2.20 H2.21 H2.22 H2.23 H2.24 H2.25 H2.26 H2.27 H2.28 H2.33 H2.34 H2.35 H2.36 H2.37 H2.38 H2.39 H2.40 H2.41 H2.42 H2.43 H2.44 H2.45 H2.46 H2.49 H2.50 H2.51 H2.52 J1.3 J1B.4 J4.4 J4.8 J4B.3 J5.1 J5BK.10 J6.4 U1.A5 U1.A8 U1.A9 U1.A10 U1.A11 U1.B5 U1.B7 U1.B8 U1.B10 U1.B11 U1.C3 U1.C5 U1.C7 U1.C8 U1.C9 U1.D1 U1.D2 U1.D3 U1.D7 U1.D8 U1.D9 U1.D10 U1.D11 U1.D14 U1.D15 U1.E1 U1.E4 U1.E5 U1.E10 U1.E15 U1.F4 U1.F16 U1.H1 U1.H2 U1.H3 U1.H15 U1.H16 U1.H17 U1.J14 U1.J15 U1.K14 U1.K16 U1.K17 U1.L2 U1.L14 U1.L16 U1.L17 U1.M4 U1.M14 U1.M16 U1.M17 U1.N2 U1.N3 U1.N6 U1.N13 U1.N14 U1.N15 U1.N17 U1.P2 U1.P3 U1.P5 U1.P6 U1.P11 U1.P12 U1.R1 U1.R2 U1.R5 U1.R6 U1.R12 U1.R15 U1.R16 U1.T3 U1.T5 U1.T6 U1.U4 U1.U5 U1.U6 U1.U7 U2.E3 U2.E7 U2.H3 U2.H7 U2.K2 U2.K3 U3.A1 U3.A2 U3.A9 U3.A10 U3.B1 U3.B10 U3.D2 U3.D3 U3.D4 U3.D5 U3.D6 U3.D7 U3.D8 U3.D9 U3.E2 U3.E3 U3.E4@72.215,63.181 U3.E5 U3.E6 U3.E7 U3.E8 U3.E9 U3.F2@70.215,62.181 U3.F3@71.215,62.181 U3.F4@72.215,62.181 U3.F5@73.215,62.181 U3.F6@74.215,62.181 U3.F7@75.215,62.181 U3.F8@76.215,62.181 U3.F9@77.215,62.181 U3.G2@70.215,61.181 U3.G3@71.215,61.181 U3.G4@72.215,61.181 U3.G5@73.215,61.181 U3.G6@74.215,61.181 U3.G7@75.215,61.181 U3.G8@76.215,61.181 U3.G9@77.215,61.181 U3.H2@70.215,60.181 U3.H3@71.215,60.181 U3.H4 U3.H5 U3.H6 U3.H7 U3.H8@76.215,60.181 U3.H9@77.215,60.181 U3.J2 U3.J3 U3.J4 U3.J5@73.215,59.181 U3.J6 U3.J7 U3.J8 U3.J9 U3.K2@70.215,58.181 U3.K3@71.215,58.181 U3.K4 U3.K5 U3.K6 U3.K7 U3.K8@76.215,58.181 U3.K9@77.215,58.181 U3.L2@70.215,57.181 U3.L3@71.215,57.181 U3.L4@72.215,57.181 U3.L5 U3.L6 U3.L7@75.215,57.181 U3.L8@76.215,57.181 U3.L9@77.215,57.181 U3.M2 U3.M3 U3.M4@72.215,56.181 U3.M5@73.215,56.181 U3.M6 U3.M7@75.215,56.181 U3.M8 U3.M9 U3.N2@70.215,55.181 U3.N3@71.215,55.181 U3.N4 U3.N5 U3.N6 U3.N7 U3.N8@76.215,55.181 U3.N9@77.215,55.181 U3.P2@70.215,54.181 U3.P3@71.215,54.181 U3.P4 U3.P5@73.215,54.181 U3.P6@74.215,54.181 U3.P7 U3.P8@76.215,54.181 U3.P9@77.215,54.181 U3.T1 U3.T10 U3.U1 U3.U2 U3.U9 U3.U10 U10.2 U10.3 U10.5

## Polygon pours and split planes (outlines as drawn)
3V3 on L3_PWR "3V3_L03" (solid, remove dead copper, pour order 33): 3.2,0 cw(c3.2,3.2) 0,3.2 0,12.33 cw(c0.8,12.33) 0.8,13.13 1,13.13 ccw(c1,13.93) 1.8,13.93 1.8,77.35 ccw(c1,77.35) 1,78.15 0.8,78.15 cw(c0.8,78.95) 0,78.95 0,86.8 cw(c3.2,86.8) 3.193,90 3.2,90 89.8,90 89.807,90 cw(c89.8,86.8) 93,86.807 93,77.307 cw(c92.2,77.307) 92.2,76.507 ccw(c92.2,75.707) 91.4,75.707 91.4,14.8 ccw(c92.2,14.8) 92.2,14 cw(c92.2,13.2) 93,13.2 93,3.2 cw(c89.8,3.2) 89.8,0 78.8,0 cw(c78.8,0.8) 78,0.8 ccw(c77.2,0.8) 77.2,1.6 67.5,1.6 cw(c67.5,1.8) 67.3,1.8 67.3,4.387 ccw(c67,4.387) 66.7,4.387 66.7,1.8 cw(c66.5,1.8) 66.5,1.6 51,1.6 15.8,1.6 ccw(c15.8,0.8) 15,0.8 cw(c14.2,0.8) 14.2,0
3V3 on L3_PWR "VDD_SDRAM_L03" (solid, pour order 26): 16.383,82.677 16.383,81.28 38.1,81.28 38.1,54.61 51.562,54.61 51.562,64.643 41.402,64.643 41.402,82.677
3V3 on L3_PWR "VDDLDO_MCU_L03" (solid, pour order 4): 16.383,81.28 16.382,79.818 36.703,79.818 36.703,39.37 48.514,39.37 50.546,37.338 50.546,25.759 47.752,25.759 47.752,25.002 51.435,25.002 51.435,37.361 53.467,37.361 53.467,37.973 51.435,37.973 49.022,40.386 48.133,41.275 38.1,41.275 38.1,81.28
3V3 on L3_PWR "VDD_MCU_L03" (solid, pour order 24): 33.785,78.15 16.319,78.15 16.319,75.12 30.226,75.12 30.226,42.356 30.226,18.296 33.528,18.296 33.528,10.668 39.646,10.668 39.646,13.008 45.974,13.008 45.974,16.523 54.864,16.523 54.864,36.576 38.876,36.576 38.876,22.352 33.785,22.352
MCU_VCAP on L3_PWR "VCAP_MCU_L03" (solid, remove dead copper, pour order 23): 43.328,41.275 48.294,41.275 51.608,37.96 53.467,37.973 53.467,37.401 51.435,37.401 51.435,23.241 47.752,23.241 47.752,22.352 52.51,22.352 52.51,34.73 52.51,36.616 54.864,36.616 54.864,38.862 52.006,38.862 48.45,42.418 43.328,42.418
3V3 on L3_PWR "VDD_eMMC_L03" (solid, pour order 28): 16.383,84.582 16.383,86.106 57.404,86.106 78.486,65.024 78.486,52.181 69.088,52.181 69.215,52.308 69.215,69.469 54.102,84.582
12V_CONN on L3_PWR "12V_CONN_L03" (solid, pour order 29): 89.154,68.326 89.154,41.275 86.487,41.275 86.487,68.326
GND on Top Layer "GND_L01" (solid, remove dead copper, pour order 38): 3.2,0 cw(c3.2,3.2) 0,3.2 0,12.33 cw(c0.8,12.33) 0.8,13.13 1,13.13 ccw(c1,13.93) 1.8,13.93 1.8,77.35 ccw(c1,77.35) 1,78.15 0.8,78.15 cw(c0.8,78.95) 0,78.95 0,86.8 cw(c3.2,86.8) 3.193,90 3.2,90 89.8,90 89.807,90 cw(c89.8,86.8) 93,86.807 93,77.307 cw(c92.2,77.307) 92.2,76.507 ccw(c92.2,75.707) 91.4,75.707 91.4,14.8 ccw(c92.2,14.8) 92.2,14 cw(c92.2,13.2) 93,13.2 93,3.2 cw(c89.8,3.2) 89.8,0 78.8,0 cw(c78.8,0.8) 78,0.8 ccw(c77.2,0.8) 77.2,1.6 67.5,1.6 cw(c67.5,1.8) 67.3,1.8 67.3,4.387 ccw(c67,4.387) 66.7,4.387 66.7,1.8 cw(c66.5,1.8) 66.5,1.6 51,1.6 15.8,1.6 ccw(c15.8,0.8) 15,0.8 cw(c14.2,0.8) 14.2,0
GND on Top Layer "GND_L01_P006" (solid, pour order 6): 50.092,81.047 50.096,81.453 49.496,81.454 49.496,80.69 49.246,80.69 49.246,82.113 50.191,83.058 52.93,83.058 50.894,81.047
12V_CONN on Top Layer "12V_CONN_L01_P010" (solid, remove dead copper, pour order 10): 45.873,87.884 61.468,87.869 61.468,85.725 88.925,85.725 88.9,65.151 83.818,65.151 83.822,68.348 86.106,68.348 86.106,78.994 82.6,83.01 61.468,83.009 61.468,79.612 47.949,79.688 47.949,80.685 45.873,80.685
12V on Top Layer "12V_EFULSE_L01" (solid, pour order 12): 36.221,79.628 50.597,79.686 50.597,80.486 47.81,80.486 47.825,83.947 45.873,83.947 45.873,87.884 36.221,87.884 36.221,81.788
NetC44_1 on Top Layer "DEBUCK_L01" (solid, remove dead copper, pour order 13): 36.221,87.884 27.912,87.884 27.912,74.742 36.221,74.759
3V3 on Top Layer "3V3_L01_P015" (solid, pour order 15): 27.912,87.884 16.383,87.884 16.383,74.727 27.965,74.727
12V_CONN on Top Layer "12V_CONN_L01_P011" (solid, pour order 11): 84.037,42.799 84.037,41.22 88.519,41.22 88.519,43.688 86.614,43.688 86.614,42.799
3V3 on Top Layer "3V3_L01_P032" (solid, remove dead copper, pour order 32): 47.483,20.269 50.785,20.269 50.785,18.288 49.165,18.288 49.165,16.383 47.483,16.383
3V3 on Top Layer "3V3_L01_P020" (solid, remove dead copper, pour order 20): 41.179,20.269 44.481,20.269 44.481,14.63 42.861,14.63 42.861,12.776 41.179,12.776
3V3 on Top Layer "3V3_L01_P018" (solid, remove dead copper, pour order 18): 34.874,20.269 38.176,20.269 38.176,11.125 34.874,11.125
GND on Bottom Layer "GND_L06" (solid, remove dead copper, pour order 40): 3.2,0 cw(c3.2,3.2) 0,3.2 0,12.33 cw(c0.8,12.33) 0.8,13.13 1,13.13 ccw(c1,13.93) 1.8,13.93 1.8,77.35 ccw(c1,77.35) 1,78.15 0.8,78.15 cw(c0.8,78.95) 0,78.95 0,86.8 cw(c3.2,86.8) 3.193,90 3.2,90 89.8,90 89.807,90 cw(c89.8,86.8) 93,86.807 93,77.307 cw(c92.2,77.307) 92.2,76.507 ccw(c92.2,75.707) 91.4,75.707 91.4,14.8 ccw(c92.2,14.8) 92.2,14 cw(c92.2,13.2) 93,13.2 93,3.2 cw(c89.8,3.2) 89.8,0 78.8,0 cw(c78.8,0.8) 78,0.8 ccw(c77.2,0.8) 77.2,1.6 67.5,1.6 cw(c67.5,1.8) 67.3,1.8 67.3,4.387 ccw(c67,4.387) 66.7,4.387 66.7,1.8 cw(c66.5,1.8) 66.5,1.6 51,1.6 15.8,1.6 ccw(c15.8,0.8) 15,0.8 cw(c14.2,0.8) 14.2,0
3V3 on Bottom Layer "3V3_L06_P022" (solid, pour order 22): 72.773,50.818 72.773,56.894 71.247,58.42 71.247,60.325 76.2,60.325 76.2,58.42 74.676,56.896 74.676,50.818 76.646,50.818 76.646,55.154 77.246,55.753 79.883,55.753 79.883,65.024 67.5,65.024 67.5,55.753 70.231,55.753 70.832,55.152 70.832,50.818
12V_CONN on Bottom Layer "12V_CONN_L06_P031" (solid, pour order 31): 84.328,67.877 88.514,67.877 88.514,65.024 84.328,65.024
12V_CONN on Bottom Layer "12V_CONN_L06_P030" (solid, pour order 30): 84.328,43.749 88.514,43.749 88.514,42.203 84.328,42.203
GND on L5_GND "GND_L05" (solid, remove dead copper, pour order 37): 3.2,0 cw(c3.2,3.2) 0,3.2 0,12.33 cw(c0.8,12.33) 0.8,13.13 1,13.13 ccw(c1,13.93) 1.8,13.93 1.8,77.35 ccw(c1,77.35) 1,78.15 0.8,78.15 cw(c0.8,78.95) 0,78.95 0,86.8 cw(c3.2,86.8) 3.193,90 3.2,90 89.8,90 89.807,90 cw(c89.8,86.8) 93,86.807 93,77.307 cw(c92.2,77.307) 92.2,76.507 ccw(c92.2,75.707) 91.4,75.707 91.4,14.8 ccw(c92.2,14.8) 92.2,14 cw(c92.2,13.2) 93,13.2 93,3.2 cw(c89.8,3.2) 89.8,0 78.8,0 cw(c78.8,0.8) 78,0.8 ccw(c77.2,0.8) 77.2,1.6 67.5,1.6 cw(c67.5,1.8) 67.3,1.8 67.3,4.387 ccw(c67,4.387) 66.7,4.387 66.7,1.8 cw(c66.5,1.8) 66.5,1.6 51,1.6 15.8,1.6 ccw(c15.8,0.8) 15,0.8 cw(c14.2,0.8) 14.2,0
GND on L2_GND "GND_L02" (solid, remove dead copper, pour order 42): 3.2,0 cw(c3.2,3.2) 0,3.2 0,12.33 cw(c0.8,12.33) 0.8,13.13 1,13.13 ccw(c1,13.93) 1.8,13.93 1.8,77.35 ccw(c1,77.35) 1,78.15 0.8,78.15 cw(c0.8,78.95) 0,78.95 0,86.8 cw(c3.2,86.8) 3.193,90 3.2,90 89.8,90 89.807,90 cw(c89.8,86.8) 93,86.807 93,77.307 cw(c92.2,77.307) 92.2,76.507 ccw(c92.2,75.707) 91.4,75.707 91.4,14.8 ccw(c92.2,14.8) 92.2,14 cw(c92.2,13.2) 93,13.2 93,3.2 cw(c89.8,3.2) 89.8,0 78.8,0 cw(c78.8,0.8) 78,0.8 ccw(c77.2,0.8) 77.2,1.6 67.5,1.6 cw(c67.5,1.8) 67.3,1.8 67.3,4.387 ccw(c67,4.387) 66.7,4.387 66.7,1.8 cw(c66.5,1.8) 66.5,1.6 51,1.6 15.8,1.6 ccw(c15.8,0.8) 15,0.8 cw(c14.2,0.8) 14.2,0
GND on L4_SIG "GND_L04" (solid, remove dead copper, pour order 41): 0,3.2 0,12.33 cw(c0.8,12.33) 0.8,13.13 1,13.13 ccw(c1,13.93) 1.8,13.93 1.8,77.35 ccw(c1,77.35) 1,78.15 0.8,78.15 cw(c0.8,78.95) 0,78.95 0,86.8 cw(c3.2,86.8) 3.193,90 3.2,90 61.8,90 cw(c61.8,89.2) 62.6,89.2 ccw(c63.4,89.2) 63.4,88.4 82.6,88.4 ccw(c82.6,89.2) 83.4,89.2 cw(c84.2,89.2) 84.2,90 89.8,90 89.807,90 cw(c89.8,86.8) 93,86.807 93,77.307 cw(c92.2,77.307) 92.2,76.507 ccw(c92.2,75.707) 91.4,75.707 91.4,14.8 ccw(c92.2,14.8) 92.2,14 cw(c92.2,13.2) 93,13.2 93,3.2 cw(c89.8,3.2) 89.8,0 78.8,0 cw(c78.8,0.8) 78,0.8 ccw(c77.2,0.8) 77.2,1.6 67.5,1.6 cw(c67.5,1.8) 67.3,1.8 67.3,4.387 ccw(c67,4.387) 66.7,4.387 66.7,1.8 cw(c66.5,1.8) 66.5,1.6 51,1.6 15.8,1.6 ccw(c15.8,0.8) 15,0.8 cw(c14.2,0.8) 14.2,0 3.2,0 cw(c3.2,3.2)

## Keep-outs
Keep-Out Layer:
  lines w0.1: 1.8,77.35 1.8,13.93 cw(c1,13.93) 1,13.13 0.8,13.13 ccw(c0.8,12.33) 0,12.33 0,3.2 ccw(c3.2,3.2) 3.2,0 14.2,0 ccw(c14.2,0.8) 15,0.8 cw(c15.8,0.8) 15.8,1.6 51,1.6 66.5,1.6 ccw(c66.5,1.8) 66.7,1.8 ; 1.8,77.35 ccw(c1,77.35) 1,78.15 0.8,78.15 cw(c0.8,78.95) 0,78.95 0,86.8 cw(c3.2,86.8) 3.193,90 ; 3.2,90 61.8,90 cw(c61.8,89.2) 62.6,89.2 ccw(c63.4,89.2) 63.4,88.4 82.6,88.4 ccw(c82.6,89.2) 83.4,89.2 cw(c84.2,89.2) 84.2,90 89.8,90 ; 67.3,1.8 ccw(c67.5,1.8) 67.5,1.6 77.2,1.6 cw(c77.2,0.8) 78,0.8 ccw(c78.8,0.8) 78.8,0 89.8,0 ccw(c89.8,3.2) 93,3.2 93,13.2 ccw(c92.2,13.2) 92.2,14 cw(c92.2,14.8) 91.4,14.8 91.4,75.707 cw(c92.2,75.707) 92.2,76.507 ccw(c92.2,77.307) 93,77.307 93,86.807 ccw(c89.8,86.8) 89.807,90

## Other copper
Top Layer:
  pour cut-out: 45.466,87.343 46.397,87.343 46.397,86.393 45.467,86.393
  pour cut-out: 49.149,82.016 49.246,82.113 49.25,81.32 49.496,81.32 49.496,81.44 49.596,81.439 49.596,80.596 49.149,80.596

## Silkscreen, mask and mechanical layers (free items; w line width, h text height)
Top Overlay:
  drawing of 34 lines, arcs and shapes, not listed
  text "12V_e" at 41.689,86.121 h0.4 r45
  text "12V_IN" at 55.659,86.121 h0.4 r45
  text "3V3" at 20.527,86.073 h0.4 r45
  text "LVDS_RxC_N" at 67.208,76.033 h0.4 r90
  text "LVDS_RxC_P" at 68.75,76.033 h0.4 r90
  text "LVDS_TxC_N" at 70.158,76.033 h0.4 r90
  text "LVDS_TxC_P" at 71.633,76.033 h0.4 r90
  text "GND" at 73.191,75.987 h0.4 r90
  text "LVDS_RxD_N" at 74.733,75.987 h0.4 r90
  text "LVDS_RxD_P" at 76.274,75.987 h0.4 r90
  text "LVDS_TxD_N" at 77.683,75.987 h0.4 r90
  text "LVDS_TxD_P" at 79.157,75.987 h0.4 r90
  text "GND" at 81.654,71.809 h0.4
  text "GND" at 81.654,70.2 h0.4
  text "NC" at 81.654,68.659 h0.4
  text "12V" at 81.654,67.251 h0.4
  text "12V" at 81.654,65.776 h0.4
  text "ShDown" at 81.654,53.841 h0.4
  text "USB_N" at 81.654,52.3 h0.4
  text "USB_P" at 81.654,50.758 h0.4
  text "SDA" at 81.654,49.283 h0.4
  text "SCL" at 81.654,47.808 h0.4
  text "CAN_L" at 81.654,46.267 h0.4
  text "CAN_H" at 81.654,44.726 h0.4
  text "GND" at 81.654,43.251 h0.4
  text "12V" at 81.654,41.776 h0.4
  text "BEE-1006 PAY-IF R1.0.0" at 63.7,28.775 h0.8
  text "SCL2" at 81.654,27.425 h0.4
  text "Designed by: Sang Huynh" at 65.168,26.343 h0.6
  text "SCL2" at 81.654,25.952 h0.4
  text "Checked by: Bao Bui" at 66.561,24.565 h0.6
  text "NC" at 81.654,24.479 h0.4
  text "GND" at 81.654,23.005 h0.4
  text "Approved by: Vu Pham" at 66.034,22.787 h0.6
  text "SDA2" at 81.654,21.532 h0.4
  text "SDA2" at 81.654,20.059 h0.4
  text "12V_EFULSE" at 19.073,3.711 h0.5 r90
  text "3V3" at 22.754,3.711 h0.5 r90
  text "LED_1" at 26.268,3.711 h0.5 r90
  text "LED_2" at 29.866,3.711 h0.5 r90
  text "VBUS_USB" at 33.464,3.711 h0.5 r90
  text "RESET" at 78.803,2.939 h0.5
  text "NC" at 54.208,2.198 h0.5 r90
  text "JTDI" at 55.764,2.198 h0.5 r90
  text "JTMS/SWDIO" at 57.32,2.198 h0.5 r90
  text "JTCK/SWCLK" at 58.875,2.198 h0.5 r90
  text "JTDO/SWO" at 60.431,2.198 h0.5 r90
Bottom Overlay:
  drawing of 54 lines, arcs and shapes, not listed
  text "GND" at 82.684,71.975 h0.4
  text "GND" at 82.684,70.68 h0.4
  text "GND" at 82.684,69.384 h0.4
  text "NC" at 82.557,68.192 h0.4
  text "12V" at 82.684,66.794 h0.4
  text "12V" at 82.684,65.498 h0.4
  text "SCL1" at 82.81,61.519 h0.4
  text "SDA1" at 82.81,59.989 h0.4
  text "SDA2" at 82.81,58.458 h0.4
  text "SCL2" at 82.81,56.927 h0.4
  text "ShDown" at 77.724,37.084 h0.4
  text "USB_N" at 77.47,35.881 h0.4
  text "USB_P" at 77.47,34.611 h0.4
  text "SDA" at 77.089,33.274 h0.4
  text "SCL" at 77.089,32.004 h0.4
  text "CAN_L" at 77.47,30.801 h0.4
  text "CAN_H" at 77.597,29.531 h0.4
  text "GND" at 77.216,28.321 h0.4
  text "12V" at 77.216,27.053 h0.4
  text "SCL2" at 82.82,26.953 h0.4
  text "SCL2" at 82.82,25.737 h0.4
  text "BEE-1006 PAY-IF R1.0.0" at 54.933,24.867 h0.8
  text "NC" at 82.82,24.521 h0.4
  text "GND" at 82.82,23.305 h0.4
  text "SDA2" at 82.82,22.089 h0.4
  text "Designed by: Sang Huynh" at 53.417,21.898 h0.6
  text "SDA2" at 82.82,20.873 h0.4
  text "Checked by: Bao Bui" at 52.311,20.12 h0.6
  text "Approved by: Vu Pham" at 52.584,18.342 h0.6
  text "UART_TX" at 55.68,5.531 h0.5 r90
  text "UART_RX" at 57.236,5.531 h0.5 r90
  text "RESET" at 58.875,4.531 h0.5 r90
  text "GND" at 54.208,3.531 h0.5 r90
  text "3V3" at 60.431,3.531 h0.5 r90
Top Solder:
  rectangle: 44.894,5.478 48.098,7.036

## Text inside footprints (layer, text, board x,y; h text height)
J6: Mechanical 13 "PCB edge" at 51,2.332 h0.81
U3: Top Assembly "A" at 65.397,66.546 h1.27; Top Assembly "U" at 65.397,50.546 h1.27; Top Assembly "1" at 69.85,68.871 h1.27 r90; Top Assembly "10" at 78.85,68.871 h1.27 r90; Top Overlay "A" at 65.615,66.681 h1.27; Top Overlay "U" at 65.715,50.381 h1.27; Top Overlay "1" at 69.815,68.581 h1.27 r90; Top Overlay "10" at 78.915,68.581 h1.27 r90